# EAGLE board IRIS_Arduino_Shield_2 (EAGLE 9.5.2)
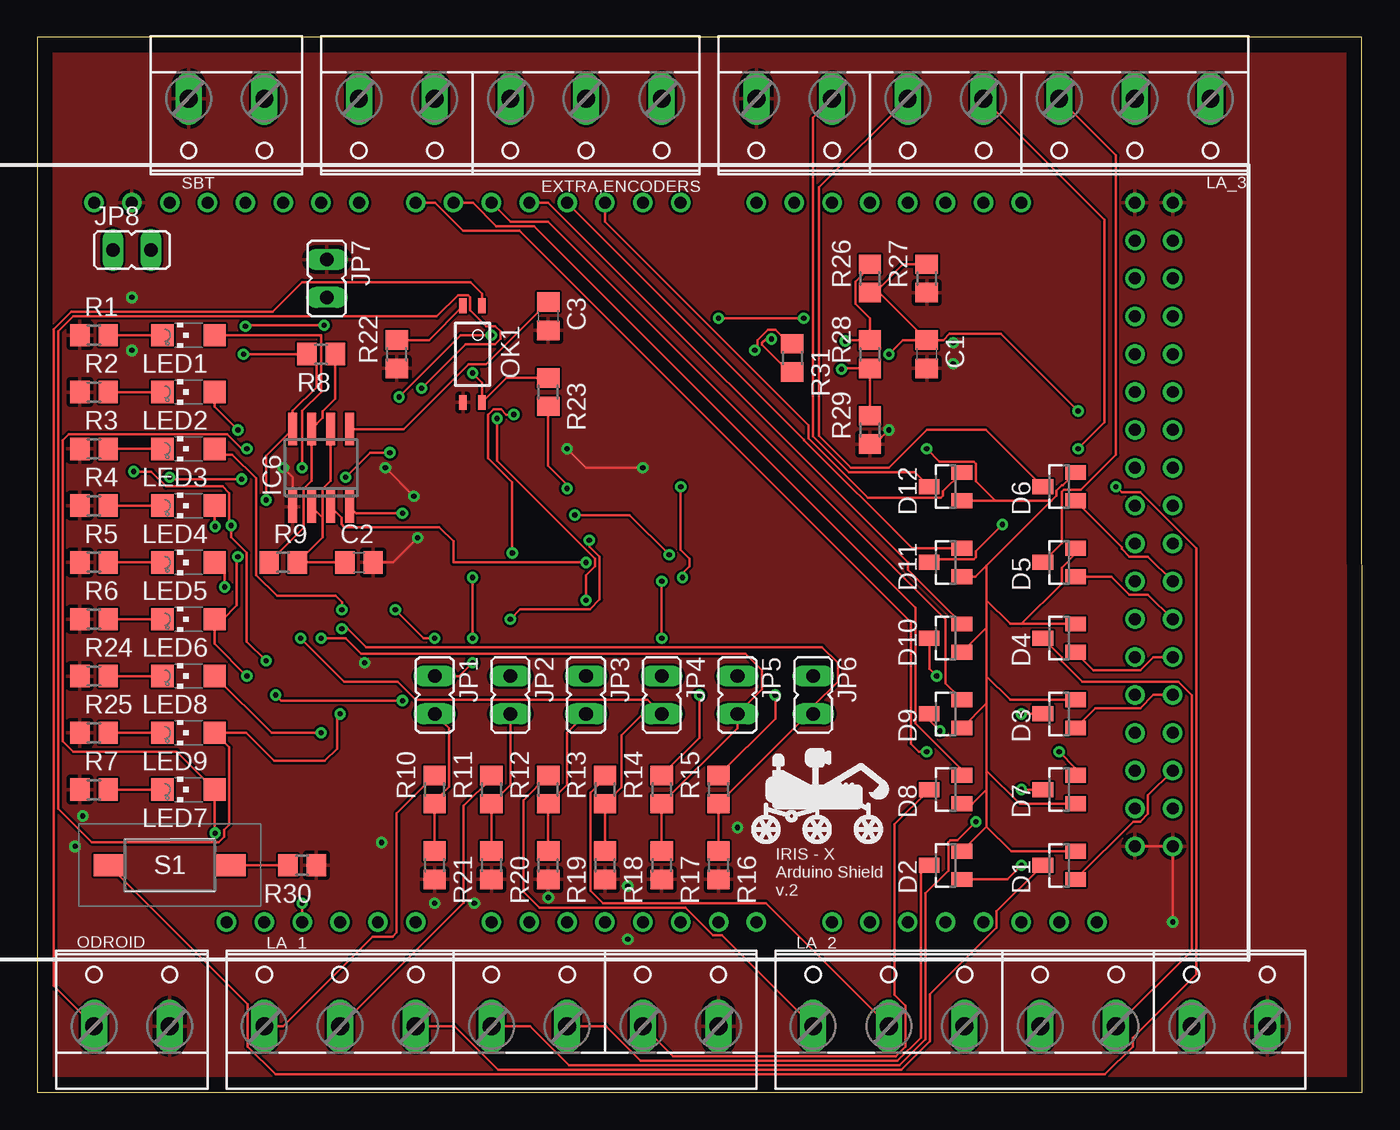
[diagram p0: board, top side]
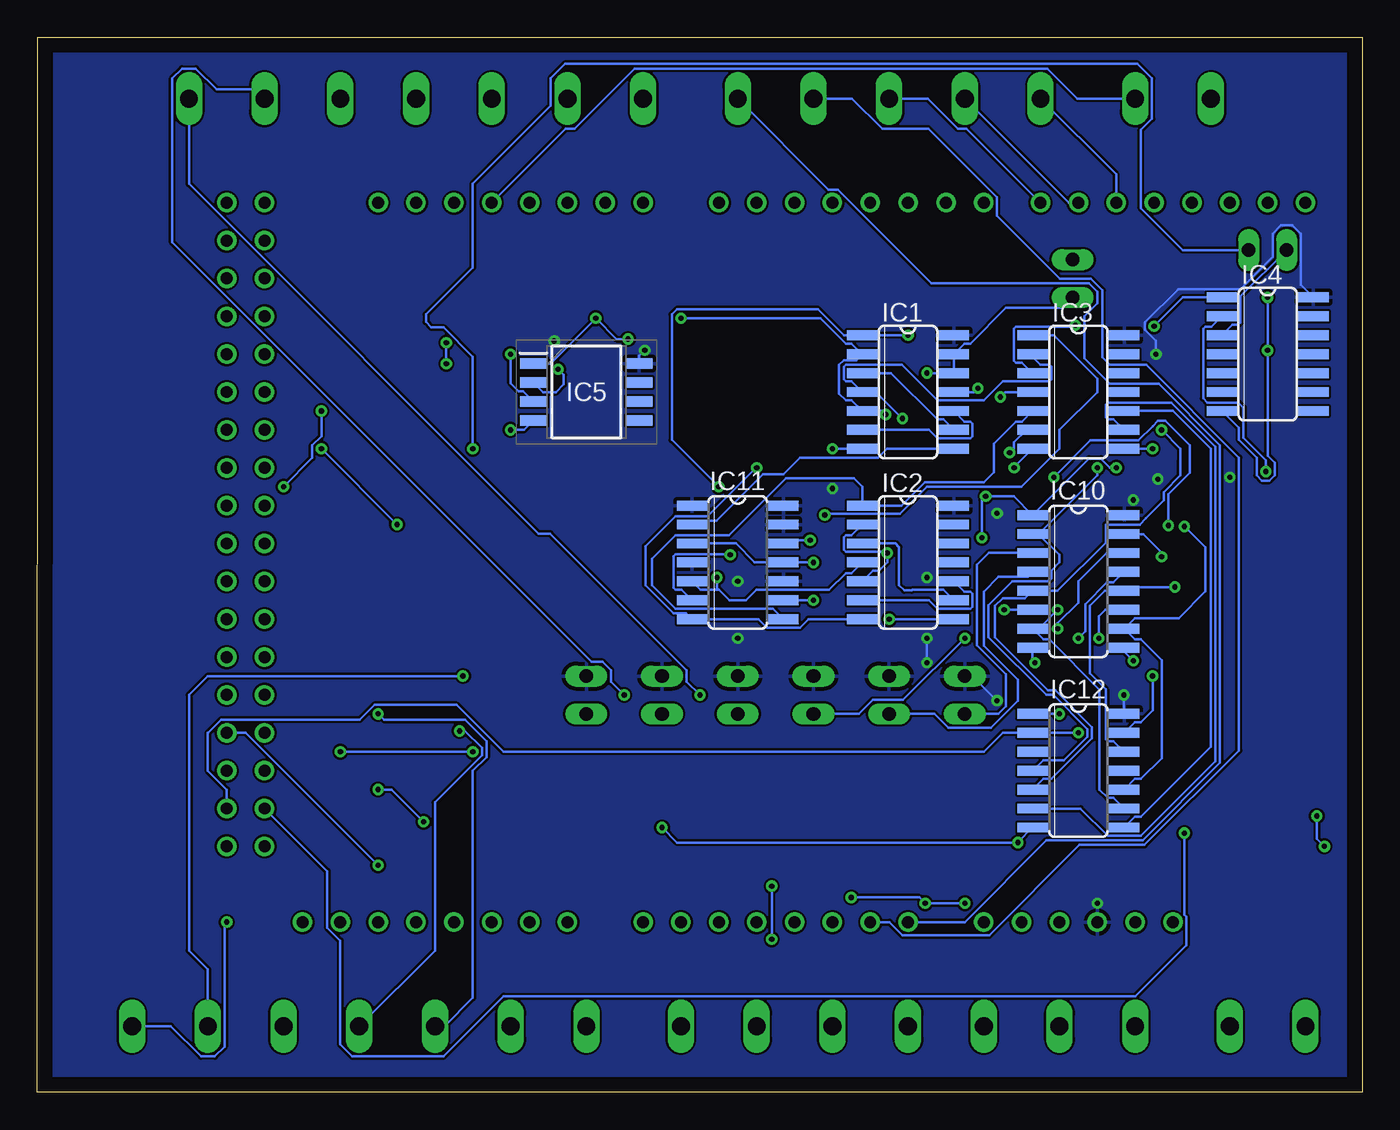
[diagram p1: board, bottom side, seen from below]

Size 88.92 x 70.79 mm. Coordinates in mm from the lower left corner, seen from the top.
Outline: 0,0 88.92,0 88.88,70.79 0,70.79 0,0
Copper layers (1*16): Top 0.035mm / dielectric 1.5mm / Bottom 0.035mm
Design rules "default": minimum track width 6mil, minimum drill 0.35mm, track to track 6mil, track to pad 6mil, pad to pad 6mil, via to via 6mil, smd to smd 6mil, copper to edge 40mil, drill to drill 6mil, minimum pad ring 10mil, minimum via ring 8mil, stop-mask expansion 4mil, vias tented up to drill 0mil, thermal gap 10mil

## Footprints (pad centres in the part's own frame; a part is rotated, then mirrored left to right if it is on the bottom)
C0805 = smd 1.3 x 1.5: 1 -0.95,0; 2 0.95,0
SOT23 = smd 1 x 1.4: 1 -0.95,-1.1; 2 0.95,-1.1; 3 0,1.1
W237-5P = drill 1.194 long: 1 -10.16,-0.635; 2 -5.08,-0.635; 3 0,-0.635; 4 5.08,-0.635; 5 10.16,-0.635
SO14 = smd 0.66 x 2.032: 1 -3.81,-3.073; 2 -2.54,-3.073; 3 -1.27,-3.073; 4 0,-3.073; 5 1.27,-3.073; 6 2.54,-3.073; 7 3.81,-3.073; 8 3.81,3.073; 9 2.54,3.073; 10 1.27,3.073; 11 0,3.073; 12 -1.27,3.073; 13 -2.54,3.073; 14 -3.81,3.073
SOIC127P780X200-8N = smd 1.8 x 0.7: 1 -3.55,1.905; 2 -3.55,0.635; 3 -3.55,-0.635; 4 -3.55,-1.905; 5 3.55,-1.905; 6 3.55,-0.635; 7 3.55,0.635; 8 3.55,1.905
SO08 = smd 0.6 x 2.2: 1 -1.905,-2.6; 2 -0.635,-2.6; 3 0.635,-2.6; 4 1.905,-2.6; 5 1.905,2.6; 6 0.635,2.6; 7 -0.635,2.6; 8 -1.905,2.6
SO16 = smd 0.66 x 2.032: 1 -4.445,-3.073; 2 -3.175,-3.073; 3 -1.905,-3.073; 4 -0.635,-3.073; 5 0.635,-3.073; 6 1.905,-3.073; 7 3.175,-3.073; 8 4.445,-3.073; 9 4.445,3.073; 10 3.175,3.073; 11 1.905,3.073; 12 0.635,3.073; 13 -0.635,3.073; 14 -1.905,3.073; 15 -3.175,3.073; 16 -4.445,3.073
JP1 = drill 0.914 long: 1 0,-1.27; 2 0,1.27
W237-7P = drill 1.194 long: 1 -15.24,-0.635; 2 -10.16,-0.635; 3 -5.08,-0.635; 4 0,-0.635; 5 5.08,-0.635; 6 10.16,-0.635; 7 15.24,-0.635
CHIPLED_1206 = smd 1.5 x 1.5: A 0,-1.75; C 0,1.75
W237-132 = drill 1.194 long: 1 -2.54,-0.635; 2 2.54,-0.635
MINI-FLAT-4 = smd 1 x 0.5: 1 -3.24,0.635; 2 -3.24,-0.635; 3 3.24,-0.635; 4 3.24,0.635
R0805 = smd 1.3 x 1.5: 1 -0.95,0; 2 0.95,0
PTS636SL43SMTRLFS = smd 2 x 1.5: 1 -4.1,0; 2 4.1,0
MEGAOUTLINE = drill 0.8: 0 12.7,24.13; 1 10.16,24.13; 2 7.62,24.13; 3 5.08,24.13; 3V3 -15.24,-24.13; 4 2.54,24.13; 5 0,24.13; 5V -12.7,-24.13; 6 -2.54,24.13; 7 -5.08,24.13; 8 -8.89,24.13; 9 -11.43,24.13; 10 -13.97,24.13; 11 -16.51,24.13; 12 -19.05,24.13; 13 -21.59,24.13; 14 17.78,24.13; 15 20.32,24.13; 16 22.86,24.13; 17 25.4,24.13; 18 27.94,24.13; 19 30.48,24.13; 20 33.02,24.13; 21 35.56,24.13; 22 43.18,21.59; 23 45.72,21.59; 24 43.18,19.05; 25 45.72,19.05; 26 43.18,16.51; 27 45.72,16.51; 28 43.18,13.97; 29 45.72,13.97; 30 43.18,11.43; 31 45.72,11.43; 32 43.18,8.89; 33 45.72,8.89; 34 43.18,6.35; 35 45.72,6.35; 36 43.18,3.81; 37 45.72,3.81; 38 43.18,1.27; 39 45.72,1.27; 40 43.18,-1.27; 41 45.72,-1.27; 42 43.18,-3.81; 43 45.72,-3.81; 44 43.18,-6.35; 45 45.72,-6.35; 46 43.18,-8.89; 47 45.72,-8.89; 48 43.18,-11.43; 49 45.72,-11.43; 50 43.18,-13.97; 51 45.72,-13.97; 52 43.18,-16.51; 53 45.72,-16.51; A0 0,-24.13; A1 2.54,-24.13; A2 5.08,-24.13; A3 7.62,-24.13; A4 10.16,-24.13; A5 12.7,-24.13; A6 15.24,-24.13; A7 17.78,-24.13; A8 22.86,-24.13; A9 25.4,-24.13; A10 27.94,-24.13; A11 30.48,-24.13; A12 33.02,-24.13; A13 35.56,-24.13; A14 38.1,-24.13; A15 40.64,-24.13; AREF -26.67,24.13; GND@1 -24.13,24.13; GND@2 -10.16,-24.13; GND@3 -7.62,-24.13; GND@4 43.18,24.13; GND@5 45.72,24.13; GND@6 43.18,-19.05; GND@7 45.72,-19.05; RESET -17.78,-24.13; VIN -5.08,-24.13

## Placement (x,y rotation side)
C1  [C0805]  59.69,49.53 270 top
C2  [C0805]  21.59,35.56 0 top
C3  [C0805]  34.29,52.07 270 top
D1  BAS40-05  [SOT23]  68.58,15.24 90 top
D2  BAS40-05  [SOT23]  60.96,15.24 90 top
D3  BAS40-05  [SOT23]  68.58,25.4 90 top
D4  BAS40-05  [SOT23]  68.58,30.48 90 top
D5  BAS40-05  [SOT23]  68.58,35.56 90 top
D6  BAS40-05  [SOT23]  68.58,40.64 90 top
D7  BAS40-05  [SOT23]  68.58,20.32 90 top
D8  BAS40-05  [SOT23]  60.96,20.32 90 top
D9  BAS40-05  [SOT23]  60.96,25.4 90 top
D10  BAS40-05  [SOT23]  60.96,30.48 90 top
D11  BAS40-05  [SOT23]  60.96,35.56 90 top
D12  BAS40-05  [SOT23]  60.96,40.64 90 top
EXTRA,ENCODERS  [W237-5P]  31.75,66.04 180 top
IC1  74AS00D  [SO14]  30.48,46.99 270 bottom
IC2  74AS00D  [SO14]  30.48,35.56 270 bottom
IC3  74ALS08D  [SO14]  19.05,46.99 270 bottom
IC4  74LS32D  [SO14]  6.35,49.53 270 bottom
IC5  LM393PSR  [SOIC127P780X200-8N]  52.07,46.99 0 bottom
IC6  NE555D  [SO08]  19.05,41.91 0 top
IC10  74AC378D  [SO16]  19.05,34.29 270 bottom
IC11  74AC74D  [SO14]  41.91,35.56 270 bottom
IC12  74AC21D  [SO14]  19.05,21.59 270 bottom
JP1  [JP1]  26.67,26.67 180 top
JP2  [JP1]  31.75,26.67 180 top
JP3  [JP1]  36.83,26.67 180 top
JP4  [JP1]  41.91,26.67 180 top
JP5  [JP1]  46.99,26.67 180 top
JP6  [JP1]  52.07,26.67 180 top
JP7  [JP1]  19.43,54.61 180 top
JP8  [JP1]  6.35,56.52 270 top
LA_1  [W237-7P]  30.48,5.08 0 top
LA_2  [W237-7P]  67.31,5.08 0 top
LA_3  [W237-7P]  63.5,66.04 180 top
LED1  [CHIPLED_1206]  10.16,50.8 90 top
LED2  [CHIPLED_1206]  10.16,46.99 90 top
LED3  [CHIPLED_1206]  10.16,43.18 90 top
LED4  [CHIPLED_1206]  10.16,39.37 90 top
LED5  [CHIPLED_1206]  10.16,35.56 90 top
LED6  [CHIPLED_1206]  10.16,31.75 90 top
LED7  [CHIPLED_1206]  10.16,20.32 90 top
LED8  [CHIPLED_1206]  10.16,27.94 90 top
LED9  [CHIPLED_1206]  10.16,24.13 90 top
ODROID  [W237-132]  6.35,5.08 0 top
OK1  TLP283  [MINI-FLAT-4]  29.21,49.53 270 top
R1  [R0805]  3.81,50.8 0 top
R2  [R0805]  3.81,46.99 0 top
R3  [R0805]  3.81,43.18 0 top
R4  [R0805]  3.81,39.37 0 top
R5  [R0805]  3.81,35.56 0 top
R6  [R0805]  3.81,31.75 0 top
R7  [R0805]  3.81,20.32 0 top
R8  [R0805]  19.05,49.53 180 top
R9  [R0805]  16.51,35.56 0 top
R10  [R0805]  26.67,20.32 90 top
R11  [R0805]  30.48,20.32 90 top
R12  [R0805]  34.29,20.32 90 top
R13  [R0805]  38.1,20.32 90 top
R14  [R0805]  41.91,20.32 90 top
R15  [R0805]  45.72,20.32 90 top
R16  [R0805]  45.72,15.24 270 top
R17  [R0805]  41.91,15.24 270 top
R18  [R0805]  38.1,15.24 270 top
R19  [R0805]  34.29,15.24 270 top
R20  [R0805]  30.48,15.24 270 top
R21  [R0805]  26.67,15.24 270 top
R22  [R0805]  24.13,49.53 90 top
R23  [R0805]  34.29,46.99 270 top
R24  [R0805]  3.81,27.94 0 top
R25  [R0805]  3.81,24.13 0 top
R26  [R0805]  55.88,54.61 90 top
R27  [R0805]  59.69,54.61 90 top
R28  [R0805]  55.88,49.53 90 top
R29  [R0805]  55.88,44.45 90 top
R30  [R0805]  17.78,15.24 180 top
R31  [R0805]  50.67,49.28 270 top
S1  [PTS636SL43SMTRLFS]  8.89,15.24 180 top
SBT  [W237-132]  12.7,66.04 180 top
U$1  MEGA_DEVICE  [MEGAOUTLINE]  30.48,35.56 0 top

## Library data of the parts
C1-C3 = rcl; SPICEPREFIX: C
D1-D12 = diode
EXTRA,ENCODERS LA_1-LA_3 ODROID SBT = con-wago-508; OC_FARNELL: unknown; OC_NEWARK: unknown
IC1-IC4 = 74xx-us
IC5 = SamacSys_Parts; DESCRIPTION: Dual differential comparator, commercial grade; HEIGHT: 2mm; MANUFACTURER_NAME: Texas Instruments; MANUFACTURER_PART_NUMBER: LM393PSR; MOUSER_PART_NUMBER: 595-LM393PSR; MOUSER_PRICE-STOCK: https://www.mouser.com/Search/Refine.aspx?Keyword=595-LM393PSR
IC6 = linear
IC10-IC12 = 74xx-eu
JP1-JP8 = jumper
LED1-LED9 = led
OK1 = optocoupler; OC_FARNELL: unknown; OC_NEWARK: unknown
R1-R31 = rcl; SPICEPREFIX: R
S1 = SamacSys_Parts; DESCRIPTION: Tactile Switches Tact 50mA 12VDC, 6.0x3.5, 4.3mm H, 130gf, G leads, No ground pin, Black Actuator; HEIGHT: 4.5mm; MANUFACTURER_NAME: C & K COMPONENTS; MANUFACTURER_PART_NUMBER: PTS636 SL43 SMTR LFS; MOUSER_PART_NUMBER: 611-PTS636SL43SMTRLF; MOUSER_PRICE-STOCK: https://www.mouser.com/Search/Refine.aspx?Keyword=611-PTS636SL43SMTRLF
U$1 = ArduinoMegaOutline

## Nets
ARDUINOOUT: IC12.2 LED8.A U$1.53
DIR1: D1.1 U$1.51
DIR2: D2.1 U$1.49
DIR3: D3.1 U$1.47
DIR4: D4.1 U$1.45
DIR5: D5.1 U$1.43
DIR6: D6.1 U$1.41
GND: C1.2 C2.2 C3.2 IC1.7 IC2.7 IC3.7 IC4.7 IC5.4 IC6.1 IC10.1 IC10.8 IC11.7 IC12.7 JP7.1 LA_1.7 LA_2.7 LA_3.7 ODROID.2 OK1.3 R1.1 R2.1 R3.1 R4.1 R5.1 R6.1 R7.1 R16.2 R17.2 R18.2 R19.2 R20.2 R21.2 R22.1 R24.1 R25.1 R27.1 R29.1 R30.1 SBT.2 U$1.GND@1 U$1.GND@4 U$1.GND@5 U$1.GND@6 U$1.GND@7
LA_TEST: D1.2 D2.2 D3.2 D4.2 D5.2 D6.2 D7.1 D8.1 D9.1 D10.1 D11.1 D12.1 JP8.2
N$1: IC1.3 IC1.9
N$2: IC1.6 IC1.10
N$3: IC1.8 IC11.2
N$4: D7.3 LA_1.4
N$5: IC6.3 IC11.3 IC11.11
N$6: IC2.8 IC11.12
N$7: LED1.C R1.2
N$8: LED2.C R2.2
N$9: LED3.C R3.2
N$10: LED4.C R4.2
N$11: LED5.C R5.2
N$12: LED6.C R6.2
N$13: IC10.2 IC12.4 LED1.A
N$14: IC10.5 IC12.5 LED2.A
N$15: IC10.7 IC12.9 LED3.A
N$16: IC10.10 IC12.10 LED4.A
N$17: IC10.12 IC12.12 LED5.A
N$18: IC10.15 IC12.13 LED6.A
N$19: IC3.9 IC12.6
N$20: IC3.10 IC12.8
N$21: IC3.8 LED7.A U$1.52
N$22: LED7.C R7.2
N$23: IC2.3 IC2.9
N$24: IC2.6 IC2.10
N$25: IC4.3 JP8.1
N$26: C1.1 IC5.3 R26.1 R27.2 S1.2
N$27: IC5.2 R28.1 R29.2
N$28: C2.1 IC6.2 IC6.6 R9.2
N$29: D1.3 LA_1.3
N$30: IC6.7 R8.1 R9.1
N$31: IC3.1 IC11.6
N$32: IC10.3 JP1.2 R10.1 R21.1
N$33: ODROID.1 OK1.1
N$34: IC10.4 JP2.2 R11.1 R20.1
N$35: IC10.6 JP3.2 R12.1 R19.1
N$36: IC10.11 JP4.2 R13.1 R18.1
N$37: IC10.13 JP5.2 R14.1 R17.1
N$38: IC10.14 JP6.2 R15.1 R16.1
N$39: D8.3 LA_1.6
N$40: D9.3 LA_2.4
N$41: IC2.1 IC3.5 IC11.8
N$42: IC1.1 IC2.4 IC3.4 IC11.5
N$43: IC1.4 IC3.2 IC11.9
N$44: D10.3 LA_2.6
N$45: D11.3 LA_3.4
N$46: LED8.C R24.2
N$47: OK1.2 R22.2
N$48: LED9.C R25.2
N$49: IC1.12 IC1.13 JP7.2 OK1.4 R23.1
N$50: EXTRA,ENCODERS.1 U$1.A0
N$51: IC1.11 IC12.1 LED9.A
N$52: EXTRA,ENCODERS.2 U$1.A1
N$53: EXTRA,ENCODERS.4 U$1.9
N$54: R30.2 S1.1
N$55: D2.3 LA_1.5
N$56: EXTRA,ENCODERS.3 U$1.8
N$57: D3.3 LA_2.3
N$58: D4.3 LA_2.5
N$59: D5.3 LA_3.3
N$60: D6.3 LA_3.5
N$61: D12.3 LA_3.6
N$62: IC3.6 IC4.2 IC10.9
N$63: LA_1.1 R10.2
N$64: LA_1.2 R11.2
N$65: LA_2.1 R12.2
N$66: LA_2.2 R13.2
N$67: LA_3.1 R14.2
N$68: LA_3.2 R15.2
N$69: C3.1 IC6.5
N$70: EXTRA,ENCODERS.5 U$1.10
N$71: IC3.3 IC4.1
PW1: D7.2 U$1.7
PWM3: D9.2 U$1.5
PWM4: D10.2 U$1.4
PWM5: D11.2 U$1.3
PWM6: D12.2 U$1.2
PWN2: D8.2 U$1.6
RC: IC1.2 IC1.5 IC2.2 IC2.5 IC5.1 R31.2
TX1: SBT.1 U$1.18
VCC: IC1.14 IC2.14 IC3.14 IC4.14 IC5.8 IC6.4 IC6.8 IC10.16 IC11.1 IC11.4 IC11.10 IC11.13 IC11.14 IC12.14 JP1.1 JP2.1 JP3.1 JP4.1 JP5.1 JP6.1 R8.2 R23.2 R26.2 R28.2 R31.1 U$1.5V

## Tracks (layer width: path | path; a pad name or v marks a point on that pad's centre or on a via)
ARDUINOOUT  (via drill 0.35)
  Top 0.152: v19.05,24.13 15.72,24.13 LED8.A
  Bottom 0.152: U$1.53 76.2,20.32 77.47,21.59 77.47,24.13 77.45,24.13 76.57,25.01 67.29,25.01 66.29,26.01 60.79,26.01 57.64,22.86 25.4,22.86 24.13,24.13 IC12.2 v19.05,24.13
DIR1
  Top 0.152: U$1.51 74.54,19.93 74.54,18.68 74.03,18.17 73.56,18.17 D1.1
DIR2  (via drill 0.35)
  Top 0.152: D2.1 65.09,14.29 v66.04,15.24
  Bottom 0.152: v66.04,15.24 74.93,24.13 U$1.49
DIR3
  Top 0.152: U$1.47 74.91,26.67 74.03,25.79 71.02,25.79 D3.1
DIR4
  Top 0.152: U$1.45 74.91,29.21 74.03,28.33 70.88,28.33 D4.1
DIR5
  Top 0.152: U$1.43 74.54,33.41 73.29,33.41 72.09,34.61 D5.1
DIR6
  Top 0.152: U$1.41 74.54,35.95 73.29,35.95 72.78,36.46 72.78,36.59 D6.1
GND  (via drill 0.35)
  Top 0.152: v40.64,41.91 36.83,41.91 v35.56,43.18 | v16.51,41.91 17.14,41.28 IC6.1 | v25.27,40 v23.37,41.91 | v25.53,37.21 23.88,35.56 C2.2 | U$1.GND@6 U$1.GND@7 v76.2,11.43 | R29.1 56.2,43.5 v57.15,44.45
  Bottom 0.152: IC3.7 23.37,41.94 v23.37,41.91 | IC1.7 v35.56,43.18 | IC2.7 37.17,31.75 37.73,31.19 39.95,31.19 40.51,31.75 IC11.7 45.39,32.16 46.22,32.16 48.11,34.04 48.11,36.64 46.09,38.66 43.93,38.66 40.68,41.91 v40.64,41.91 | IC10.8 22.12,28.98 v21.97,28.83 | v26.67,12.7 v29.34,12.7 29.72,13.08 v34.29,13.08 | v16.51,41.91 16.92,41.91 17.53,42.52 18.34,42.52 IC10.1 23.39,40 v25.27,40 25.53,39.75 v25.53,37.21 | v39.62,10.29 v39.62,13.84 | v76.2,11.43 76.35,11.28 76.35,3.08 77,2.43 77.94,2.43 79.95,4.45 LA_2.7 | v3.05,18.54 3.05,17.02 v2.54,16.51 | v6.35,53.34 v6.35,49.78 6.35,42.72 5.87,42.24 5.87,41.41 6.23,41.05 6.73,41.05 7.08,41.41 7.08,42.59 8.28,43.79 8.28,44.58 IC4.7 | IC12.7 23.11,16.79 v23.11,16.76 45.97,16.76 v46.99,17.78 | v61.47,50.29 v61.47,48.89 | v57.15,44.45 56.25,44.45 IC5.4
  pour Top: -2.54,73.66 -2.54,-2.54 91.44,-2.54 91.44,73.66
LA_TEST  (via drill 0.35)
  Top 0.152: D6.2 68.81,40.72 68.76,40.72 68.41,40.37 68.41,40.05 68.05,39.69 | D12.1 64.29,39.69 | 64.29,39.69 68.05,39.69 | 68.05,39.69 63.71,35.35 | 63.71,35.35 62.97,34.61 D11.1 | 63.71,35.35 63.71,33.02 | 63.71,33.02 63.71,31.18 | 63.71,31.18 63.71,27.94 | 63.71,27.94 63.71,26.1 | 63.71,26.1 63.71,21.59 | 63.71,21.59 63.71,20.32 | 63.71,20.32 63.71,17.84 | 63.71,17.84 D2.2 | D1.2 65.36,16.19 63.71,17.84 | D7.1 65.93,19.37 63.71,21.59 | D8.1 62.76,19.37 63.71,20.32 | D9.1 63.71,26.1 | D3.2 65.3,26.35 63.71,27.94 | D10.1 63.71,31.18 | D4.2 66.04,31.43 | 66.04,31.43 65.3,31.43 63.71,33.02 | 66.04,31.43 68.75,34.14 68.75,35.2 69.68,36.13 D5.2 | v59.69,43.18 60.55,42.32 62.86,42.32 62.99,42.19 62.99,41 64.29,39.69
  Bottom 0.152: JP8.2 12.04,56.52 14.85,59.32 14.85,64.58 14.12,65.31 14.12,68.04 15.08,69 53.5,69 54.46,68.04 54.46,66.19 59.69,60.96 59.69,55.34 62.84,52.19 62.84,51.69 62.48,51.34 61.65,51.34 59.69,49.37 v59.69,43.18
N$1
  Bottom 0.152: IC1.9 28.12,45.16 28.52,45.16 31.62,48.26 IC1.3
N$2
  Bottom 0.152: IC1.6 29.08,44.45 28.52,43.89 26.3,43.89 26.16,44.03 26.16,44.88 26.3,45.01 26.7,45.01 IC1.10
N$3
  Bottom 0.152: IC11.2 44.73,38.35 43.34,38.35 40.21,41.48 38.83,41.48 37.73,42.57 32.49,42.57 31.88,43.18 IC1.8
N$4  (via drill 0.35)
  Top 0.152: LA_1.4 33.08,4.45 35.7,1.82 57.87,1.82 59.61,3.55 59.61,13.36 61.13,14.89 61.13,16.79 61.27,16.92 61.75,16.92 v62.99,18.16 | D7.3 v66.04,20.32
  Bottom 0.152: v62.99,18.16 65.15,20.32 v66.04,20.32
N$5  (via drill 0.35)
  Top 0.152: IC6.3 20.43,38.57 20.43,38.11 20.61,37.94 26.97,37.94 27.94,36.96 27.94,35.56 v36.83,35.56
  Bottom 0.152: IC11.3 42.04,36.83 40.77,35.56 IC11.11 v36.83,35.56
N$6  (via drill 0.35)
  Top 0.152: v37.05,37.05 37.05,36.63 37.74,35.94 37.74,33.07 37.08,32.41 32.41,32.41 v31.75,31.75
  Bottom 0.152: IC2.8 v31.75,31.75 | v37.05,37.05 38.61,37.05 IC11.12
N$7
  Top 0.152: LED1.C R1.2
N$8
  Top 0.152: LED2.C R2.2
N$9
  Top 0.152: LED3.C R3.2
N$10
  Top 0.152: LED4.C R4.2
N$11
  Top 0.152: LED5.C R5.2
N$12
  Top 0.152: LED6.C R6.2
N$13  (via drill 0.35)
  Top 0.152: v17.78,41.91 17.78,45.72 19.05,46.99 19.05,50.8 LED1.A
  Bottom 0.152: v17.78,41.91 17.78,41.41 21.72,37.47 | 21.72,37.47 IC10.2 | IC12.4 21.41,22.3 20.02,22.3 18.44,23.88 18.44,24.38 20.73,26.67 21.21,26.67 25.09,30.56 25.09,32.69 23.49,34.29 21.09,34.29 20.88,34.5 20.88,35 20.32,35.56 20.32,36.06 21.72,37.47
N$14  (via drill 0.35)
  Top 0.152: v13.46,44.45 11.91,46 LED2.A
  Bottom 0.152: IC12.5 21.41,21.03 20.86,21.03 18.14,23.75 18.14,24.51 20.61,26.97 21.08,26.97 24.64,30.53 24.64,32.64 24.13,33.15 22.63,33.15 IC10.5 20.45,33.66 17.22,36.89 17.22,38.1 14.94,38.1 14.52,38.53 13.32,39.72 13.32,40.26 12.19,41.39 12.19,42.41 12.19,43.18 v13.46,44.45
N$15  (via drill 0.35)
  Top 0.152: LED3.A 12.3,42.78 13.09,42.78 14.68,41.2 14.68,34.72 16.09,33.31 20.03,33.31 20.45,32.89 v20.45,32.39
  Bottom 0.152: IC12.9 16.69,19.76 17.09,19.76 17.63,20.3 17.63,27.02 21.01,30.4 21.41,30.4 IC10.7 21.72,31.11 v20.45,32.39
N$16  (via drill 0.35)
  Top 0.152: LED4.A 11.91,38 v11.94,37.97
  Bottom 0.152: IC12.10 15.27,21.03 14.87,21.03 13.46,22.43 13.46,29 14.87,30.4 15.27,30.4 IC10.10 15.27,31.83 12.33,31.83 10.54,33.61 10.54,36.58 v11.94,37.97
N$17  (via drill 0.35)
  Top 0.152: LED5.A 12.57,34.9 v12.57,33.91
  Bottom 0.152: IC12.12 16.69,23.57 17.09,23.57 17.22,23.71 17.22,27.04 18.29,28.11 18.29,32.64 17.27,33.66 IC10.12 15.72,33.91 v12.57,33.91
N$18  (via drill 0.35)
  Top 0.152: v13.46,35.94 13.4,35.88 13.4,32.68 12.46,31.75 LED6.A 11.91,30.1 v14.07,27.94
  Bottom 0.152: v13.46,35.94 13.46,36.22 14.71,37.47 IC10.15 | IC12.13 15.27,24.84 14.87,24.84 14.07,25.64 v14.07,27.94
N$19
  Bottom 0.152: IC12.6 18.92,19.05 17.09,17.22 14.87,17.22 9.85,22.23 9.85,43.31 12.83,46.28 17.09,46.28 17.22,46.14 17.22,45.3 17.09,45.16 16.69,45.16 IC3.9
N$20
  Bottom 0.152: IC12.8 15.27,18.49 14.87,18.49 10.16,23.2 10.16,43.18 12.7,45.72 IC3.10
N$21  (via drill 0.35)
  Top 0.152: v11.94,17.4 11.91,17.43 LED7.A 9.37,22.86 2.41,22.86 1.7,23.57 1.7,43.75 2.11,44.16 12.75,44.16 13.73,43.18 v14.07,43.18
  Bottom 0.152: U$1.52 69.46,14.85 69.46,11.06 68.58,10.18 68.58,3.23 67.78,2.43 61.65,2.43 57.62,6.46 15.24,6.46 11.82,9.89 11.82,11.8 11.94,11.92 v11.94,17.4 | v14.07,43.18 IC3.8
N$22
  Top 0.152: LED7.C R7.2
N$23
  Bottom 0.152: IC2.9 28.12,33.73 30.18,33.73 30.23,33.68 30.73,33.68 31.09,34.04 31.09,36.58 31.34,36.83 IC2.3
N$24
  Bottom 0.152: IC2.6 29.08,33.02 28.52,32.46 26.3,32.46 26.16,32.59 26.16,33.44 26.3,33.58 26.7,33.58 IC2.10
N$25
  Bottom 0.152: JP8.1 8.18,53.42 8.18,51.64 8.31,51.51 8.71,51.51 IC4.3
N$26  (via drill 0.35)
  Top 0.152: C1.1 56.51,53.66 R26.1 56.2,53.66 58.1,55.56 R27.2 | S1.2 14.12,5.91 14.12,3.08 15.99,1.21 71.64,1.21 73.51,3.08 73.51,3.66 77.77,7.93 77.77,36.5 74.03,40.25 72.78,40.25 v72.39,40.64 | v57.15,49.53 58.1,50.48 C1.1 | C1.1 60.8,50.48 61.22,50.9 64.67,50.9 v69.85,45.72
  Bottom 0.152: v72.39,40.64 70.46,42.57 70.46,43.43 69.85,44.04 v69.85,45.72 | IC5.3 56.31,47.05 56.61,47.05 57.15,47.58 v57.15,49.53
N$27  (via drill 0.35)
  Top 0.152: R29.2 R28.1 54.04,48.58 v53.97,48.51
  Bottom 0.152: IC5.2 54.98,46.99 54.1,46.99 53.59,47.5 53.59,48.13 v53.97,48.51
N$28
  Top 0.152: C2.1 R9.2 19.16,37.26 19.16,38.57 | IC6.6 19.68,41.03 19.16,40.5 19.16,38.57 | IC6.2 19.16,38.57
N$29
  Top 0.152: D1.3 64.38,12.14 64.38,11.06 59.91,6.59 59.91,3.43 57.99,1.51 30.93,1.51 27.99,4.45 LA_1.3
N$30
  Top 0.152: R8.1 20,46.55 19.16,45.7 19.16,45.25 IC6.7 18.41,41.03 17.89,40.5 17.89,37.89 R9.1
N$31  (via drill 0.35)
  Top 0.152: v42.42,36.07 39.75,38.73 v36.07,38.73
  Bottom 0.152: IC11.6 45.69,33.73 46.09,33.73 46.23,33.86 46.23,35.98 46.09,36.12 42.47,36.12 v42.42,36.07 | IC3.1 20.7,50.8 17.78,47.88 17.78,46.99 20.32,44.45 20.32,43.18 22.86,40.64 29.21,40.64 31.04,38.81 35.99,38.81 v36.07,38.73
N$32
  Top 0.152: R21.1 R10.1 26.67,19.55 27.65,20.53 27.65,24.42 JP1.2
  Bottom 0.152: IC10.3 25.06,36.19 25.86,35.4 25.86,30.01 23.9,28.05 23.9,25.92 24.43,25.4 JP1.2
N$33
  Top 0.152: ODROID.1 1.09,7.16 1.09,51.19 2.28,52.38 15.8,52.38 17.78,54.36 29.08,54.36 29.84,53.59 OK1.1
N$34
  Top 0.152: R20.1 R11.1 31.75,20.64 JP2.2
  Bottom 0.152: IC10.4 22.45,34.59 24.41,34.59 25.4,33.6 25.4,29.98 23.11,27.69 23.11,26.29 24.93,24.46 27.77,24.46 28.71,25.4 JP2.2
N$35  (via drill 0.35)
  Top 0.152: R19.1 R12.1 35.56,20.64 35.56,24.13 JP3.2 | v26.67,30.48 25.94,30.48 v24.03,32.39
  Bottom 0.152: v26.67,30.48 30.81,26.34 32.85,26.34 33.79,25.4 JP3.2 | v24.03,32.39 IC10.6
N$36  (via drill 0.35)
  Top 0.152: R18.1 R13.1 39.21,20.48 39.21,23.97 40.64,25.4 JP4.2 40.97,26.34 25.4,26.34 24.18,27.56 20.6,27.56 v17.68,30.48
  Bottom 0.152: IC10.11 17.25,32.39 17.68,31.95 v17.68,30.48
N$37  (via drill 0.35)
  Top 0.152: R17.1 R14.1 46.99,24.45 JP5.2 48.64,27.05 48.64,28.33 47.53,29.44 21.74,29.44 20.7,30.48 v19.05,30.48
  Bottom 0.152: v19.05,30.48 18.59,30.94 18.59,32.77 17.14,34.21 16.69,34.21 IC10.13
N$38  (via drill 0.35)
  Top 0.152: R16.1 R15.1 51.75,25.4 JP6.2 52.07,25.9 53.72,27.55 53.72,28.83 52.68,29.87 22.07,29.87 20.83,31.11 v20.45,31.11
  Bottom 0.152: v20.45,31.11 20.45,31.47 19.05,32.87 19.05,34.29 17.14,36.19 IC10.14
N$39
  Top 0.152: D8.3 57.54,18 57.54,6.54 58.27,5.81 58.27,3.08 57.62,2.43 42.66,2.43 LA_1.6
N$40  (via drill 0.35)
  Top 0.152: D9.3 59.86,24.98 v60.58,24.26
  Bottom 0.152: v60.58,24.26 60.23,24.26 59.08,23.11 59.08,22.61 62.23,19.46 62.23,9.52 LA_2.4
N$41
  Bottom 0.152: IC11.8 39.55,32.46 46.09,32.46 47.68,34.04 47.68,35.81 46.09,37.39 42.49,37.39 38.68,41.2 34.11,41.2 33.55,40.64 IC2.1 30.91,39.37 29.34,40.94 25.4,40.94 24.74,41.61 24.74,43.51 23.23,45.01 22.84,45.01 IC3.5
N$42  (via drill 0.35)
  Top 0.152: v43.18,40.64 43.18,36.42 43.79,35.81 43.79,35.31 43.31,34.83 v43.31,34.54 | v24.29,46.66 28.43,50.8 v30.48,50.8
  Bottom 0.152: IC2.4 34.27,34.85 34.66,34.85 35.78,33.73 40.64,33.73 41.35,33.02 42.47,33.02 43.18,33.73 | IC11.5 44.42,33.73 43.18,33.73 | v24.29,46.66 23.96,46.99 IC3.4 | v30.48,50.8 IC1.1 34.79,50.8 36.54,52.55 45.97,52.55 46.33,52.19 46.33,43.79 v43.18,40.64 | v43.31,34.54 43.31,33.86 43.18,33.73
N$43  (via drill 0.35)
  Top 0.152: v30.86,45.21 30.86,42.39 37.44,35.81 37.44,35.31 36.83,34.7 v36.83,33.02
  Bottom 0.152: IC11.9 v36.83,33.02 | v30.86,45.21 32.64,46.99 IC1.4 34.27,47.7 34.66,47.7 34.8,47.84 34.8,48.69 34.66,48.82 30.91,48.82 28.52,46.43 25.38,46.43 24.11,47.7 21.01,47.7 20.88,47.84 20.88,48.69 21.01,48.82 21.59,48.82 22.12,49.35 IC3.2
N$44  (via drill 0.35)
  Top 0.152: D10.3 59.86,28.43 v60.35,27.94
  Bottom 0.152: v60.35,27.94 77.47,27.94 78.74,26.67 78.74,9.52 77.47,8.25 LA_2.6
N$45  (via drill 0.35)
  Top 0.152: LA_3.4 71.63,58.55 71.63,44.96 v69.85,43.18 | D11.3 60.08,35.78 62.86,35.78 62.99,35.92 62.99,36.32 v64.77,38.1
  Bottom 0.152: v69.85,43.18 v64.77,38.1
N$46
  Top 0.152: LED8.C R24.2
N$47
  Top 0.152: OK1.2 26.28,50.48 R22.2
N$48
  Top 0.152: R25.2 LED9.C
N$49  (via drill 0.35)
  Top 0.152: R23.1 31.5,47.94 OK1.4 29.84,47.62 v29.21,48.26
  Bottom 0.152: JP7.2 20.14,52.63 23.91,52.63 26.3,50.24 26.7,50.24 IC1.13 IC1.12 v29.21,48.26
N$50
  Bottom 0.152: EXTRA,ENCODERS.1 35.81,60.57 35.19,60.57 28.9,54.28 18.33,54.28 17.78,53.73 17.78,52.95 18.64,52.09 18.64,49.26 16.93,47.55 13.67,47.55 9.55,43.43 9.55,22.11 14.74,16.92 21.18,16.92 26.67,11.43 U$1.A0
N$51  (via drill 0.35)
  Top 0.152: v20.32,25.4 20.11,25.19 20.11,23.07 19.3,22.25 15.9,22.25 14.02,24.13 LED9.A 12.89,23.15 12.89,17.97 12.54,17.62 12.54,17.15 12.19,16.79 3.66,16.79 1.4,19.05 1.4,51.06 2.41,52.07 26.8,52.07 28.23,53.5 28.92,53.5 29.05,53.37 29.05,52.49 30.13,51.41 30.73,51.41 31.09,51.05 31.09,50.55 30.73,50.19 28.73,50.19 v25.79,47.25
  Bottom 0.152: v20.32,25.4 IC12.1 | IC1.11 26.05,46.99 v25.79,47.25
N$52
  Bottom 0.152: U$1.A1 31.73,11.43 30.85,10.55 25.03,10.55 18.97,16.61 14.61,16.61 8.28,22.94 8.28,42.6 14.51,48.82 16.93,48.82 17.43,49.31 17.43,53.81 18.2,54.59 20.29,54.59 24.52,58.81 24.52,60.06 29.12,64.66 32.22,64.66 34.23,66.67 EXTRA,ENCODERS.2
N$53
  Bottom 0.152: EXTRA,ENCODERS.4 19.68,59.69 U$1.9
N$54
  Top 0.152: R30.2 S1.1
N$55
  Top 0.152: LA_1.5 38.16,4.45 40.48,2.12 57.74,2.12 59.3,3.68 59.3,14.68 D2.3
N$56
  Bottom 0.152: U$1.8 26.56,64.66 27.14,64.66 29.16,66.67 EXTRA,ENCODERS.3
N$57  (via drill 0.35)
  Top 0.152: D3.3 v66.04,25.4
  Bottom 0.152: v66.04,25.4 65.63,24.99 60.2,24.99 58.78,23.57 58.78,22.48 59.69,21.57 59.69,6.35 61.59,4.45 LA_2.3
N$58
  Top 0.152: D4.3 68.75,29.21 68.75,28.93 70.13,27.55 76.57,27.55 77.47,26.65 77.47,9.52 LA_2.5
N$59
  Top 0.152: D5.3 68.75,36.83 68.75,40.28 68.88,40.42 70.03,40.42 72.39,42.78 72.39,62.87 LA_3.3
N$60
  Top 0.152: D6.3 63.67,44.45 59.69,44.45 57.15,41.91 54.61,41.91 52.46,44.06 52.46,60.71 LA_3.5
N$61
  Top 0.152: D12.3 58.89,41.61 54.48,41.61 52.07,44.02 52.07,65.41 LA_3.6
N$62  (via drill 0.35)
  Top 0.152: v15.37,28.96 14.07,30.25 14.07,36.19 13.02,37.24 v13.02,38.04 12.89,38.17 12.89,40.22 12.43,40.67 8.64,40.67 7.65,41.66 v6.48,41.66 | v20.7,41.28 22.35,42.93 v23.67,42.93
  Bottom 0.152: IC10.9 15.98,29.57 v15.37,28.96 | v13.02,38.04 13.02,40.14 11.59,41.57 11.59,43.43 13.21,45.06 13.71,45.06 14.07,44.7 14.07,44.69 15.02,43.74 18.24,43.74 v20.7,41.28 | v23.67,42.93 23.37,43.23 23.37,43.61 22.52,44.45 IC3.6 | v6.48,41.66 6.48,42.42 7.98,43.92 7.98,45.94 8.31,46.28 10.38,46.28 10.67,46.56 10.67,51.23 10.53,51.36 10.13,51.36 IC4.2
N$63
  Top 0.152: R10.2 24.13,18.73 24.13,10.74 23.84,10.45 22.52,10.45 16.51,4.45 LA_1.1
N$64
  Top 0.152: LA_1.2 28.61,12.74 28.61,19.23 30.48,21.09 R11.2
N$65
  Top 0.152: LA_2.1 45.97,10.55 45.35,10.55 43.51,12.39 33.7,12.39 32.64,13.46 32.64,19.62 R12.2
N$66
  Top 0.152: LA_2.2 48.89,12.7 37.97,12.7 37.12,13.54 37.12,20.11 38.1,21.09 R13.2
N$67  (via drill 0.35)
  Top 0.152: R14.2 44.45,23.81 v44.45,26.67
  Bottom 0.152: LA_3.1 78.74,60.96 55.27,37.49 54.5,37.49 45.34,28.33 45.34,27.56 v44.45,26.67
N$68  (via drill 0.35)
  Top 0.152: R15.2 49.53,25.08 v49.53,26.67
  Bottom 0.152: v49.53,26.67 50.42,27.56 50.42,28.33 50.97,28.88 51.72,28.88 79.86,57.03 79.86,68.04 79.21,68.69 78.27,68.69 76.89,67.31 74.3,67.31 LA_3.2
N$69
  Top 0.152: C3.1 30.14,48.87 28.96,48.87 24.6,44.51 IC6.5
N$70
  Bottom 0.152: U$1.10 16.51,61.59 EXTRA,ENCODERS.5
N$71  (via drill 0.35)
  Top 0.152: v19.25,51.46 14.03,51.46 v13.97,51.41
  Bottom 0.152: IC3.3 22.84,48.97 23.23,48.97 23.37,49.11 23.37,51.23 23.23,51.36 19.35,51.36 v19.25,51.46 | v13.97,51.41 12.04,53.34 IC4.1
PW1  (via drill 0.35)
  Top 0.152: U$1.7 26.69,59.69 28.57,57.81 32.36,57.81 58.63,31.54 58.63,23.39 59.16,22.86 v59.69,22.86 | v68.58,22.86 69.68,21.76 D7.2
  Bottom 0.152: v59.69,22.86 v68.58,22.86
PWM3
  Top 0.152: U$1.5 31.75,58.42 34.29,58.42 60.96,31.75 60.96,27.45 D9.2
PWM4
  Top 0.152: D10.2 58.42,35.07 58.42,35.56 34.29,59.69 U$1.4
PWM5
  Top 0.152: U$1.3 51.46,43.79 51.46,43.77 58.72,36.51 D11.2
PWM6
  Top 0.152: U$1.2 38.1,58.42 51.77,44.75 51.77,43.89 55.75,39.91 60.66,39.91 60.79,40.05 60.79,40.32 D12.2
PWN2
  Top 0.152: U$1.6 29.23,59.69 30.81,58.12 33.33,58.12 58.93,32.51 58.93,24.79 62.06,21.66 D8.2
RC  (via drill 0.35)
  Top 0.152: v31.88,36.19 31.88,40.94 30.25,42.56 30.25,45.46 30.61,45.82 31.11,45.82 31.45,45.48 v31.99,45.48 | v45.72,51.94 v51.44,51.94 | v49.28,50.55 48.89,50.55 48.64,50.29 48.64,50.17 50.48,48.33 R31.2
  Bottom 0.152: v45.72,51.94 36.37,51.94 34.66,50.24 34.27,50.24 IC1.2 33.96,49.12 34.79,49.12 35.1,48.81 35.1,46.87 34.66,46.43 34.27,46.43 IC1.5 32.23,45.72 v31.99,45.48 | IC2.5 32.84,35 32.44,35 31.88,35.57 v31.88,36.19 31.95,36.27 34.66,36.27 34.8,36.41 34.8,37.25 34.66,37.39 34.27,37.39 IC2.2 | IC5.1 54.48,48.89 v51.44,51.94 50.04,50.55 v49.28,50.55
TX1
  Bottom 0.152: U$1.18 53.45,64.66 52.87,64.66 48.84,68.69 21.12,68.69 19.1,66.67 SBT.1
VCC  (via drill 0.35)
  Top 0.152: R26.2 55.88,55.38 54.9,54.41 54.9,52.92 55.88,51.94 R28.2 54.29,50.48 v54.23,50.42 | v35.56,40.51 35.56,40.77 34.29,42.04 R23.2 | v13.84,49.53 R8.2 18.74,48.89 18.74,47.32 17.14,45.72 IC6.8 15.37,42.73 v15.37,39.75 | v24.51,26.29 16.38,26.29 v16,26.67 | U$1.5V v17.78,12.7 | v24.51,38.86 21.4,38.86 IC6.4 | v8.89,41.28 9.02,41.15 v13.72,41.15 | v41.91,34.29 v41.91,30.48 | v29.21,34.54 v29.21,30.48 | v29.21,28.83 28.32,27.94 JP1.1 | R31.1 50.45,50.23 49.53,51.15 49.02,51.15 48.34,50.46 48.34,49.99 v48.15,49.8
  Bottom 0.152: v24.51,26.29 26.16,27.94 JP1.1 | IC12.14 16,25.43 v16,26.67 | v29.21,30.48 v29.21,28.83 | IC4.14 4.14,54.2 4.14,57.62 4.69,58.17 5.47,58.17 6.02,57.62 6.02,56.08 8.2,53.9 12.34,53.9 14.58,51.66 14.58,51.16 13.84,50.42 v13.84,49.53 | v48.15,49.8 48.52,49.43 IC5.8
  pour Bottom: -5.08,76.2 95.25,76.2 95.25,-3.81 93.98,-5.08 -3.81,-5.08 -6.35,-2.54 -6.35,74.93

## Text on the board
tNames: IRIS - X / Arduino Shield / v.2